# Altium PCB PCBV3_b.PcbDoc
Units mm, origin at the board's own origin, x right, y up, seen from the top; angles counter-clockwise.
Board outline 25 x 50 mm, 2 copper layers (Top Layer, Bottom Layer); 34 components, 34 nets, 132 pads, 7 vias.
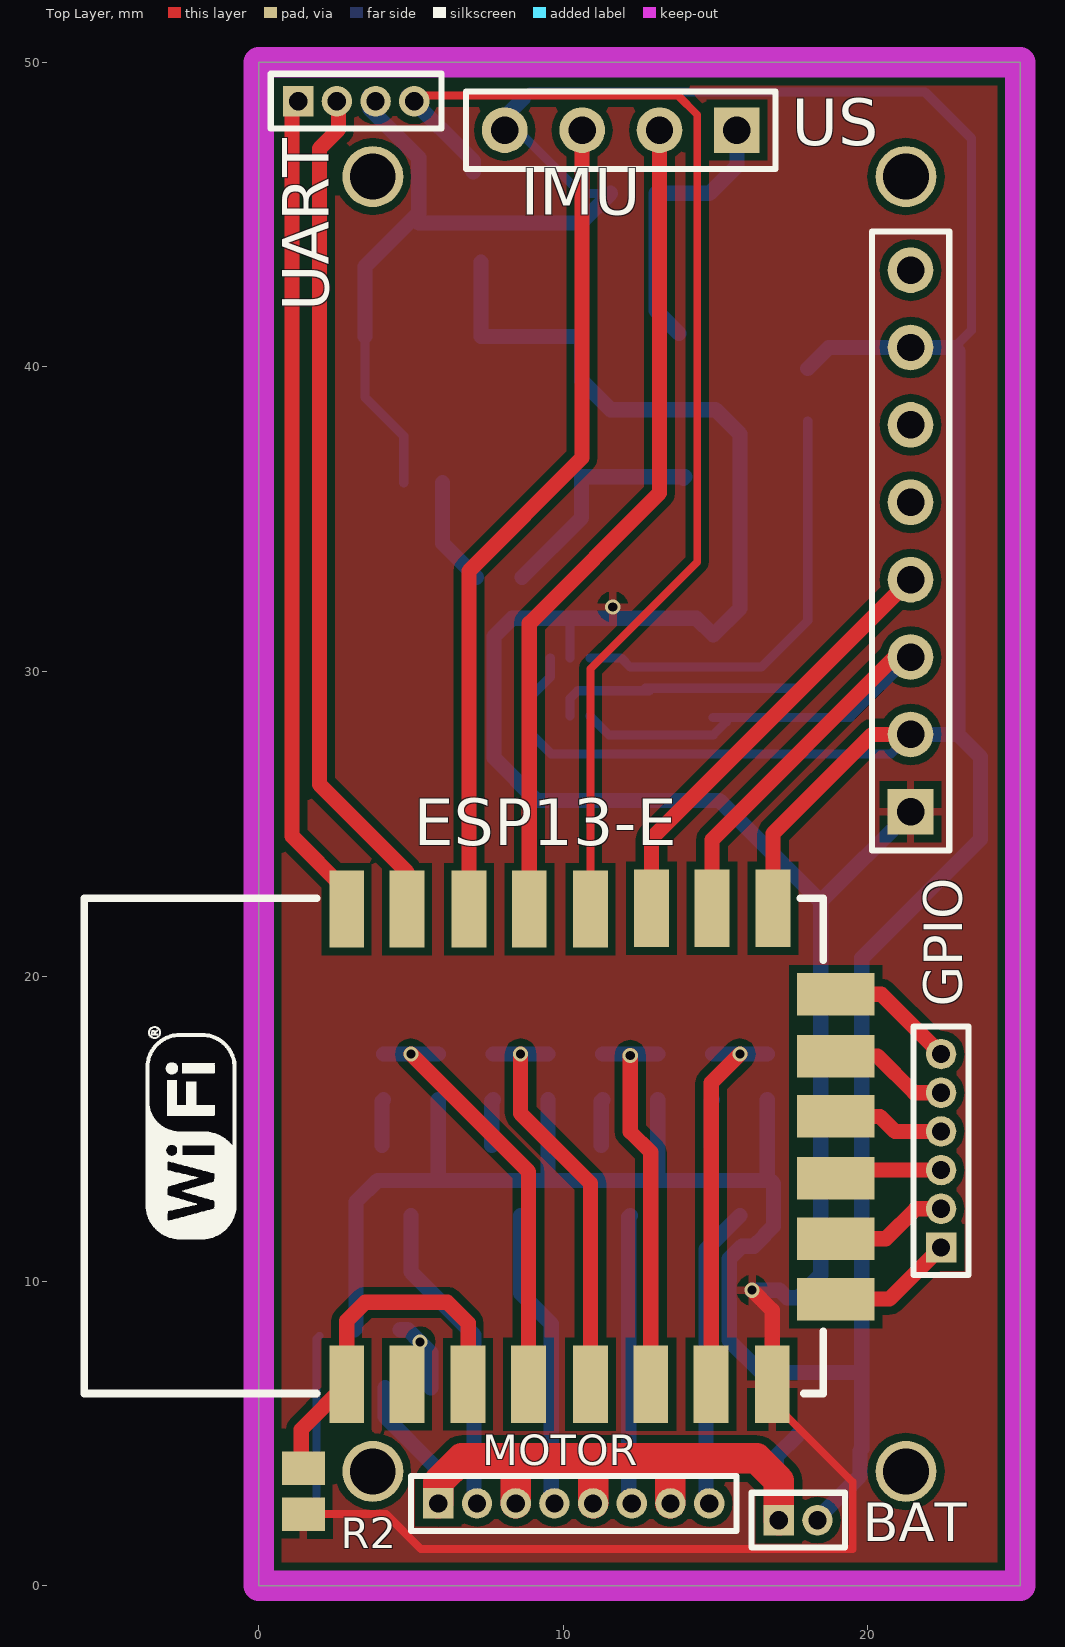
[diagram p0: Top Layer view]
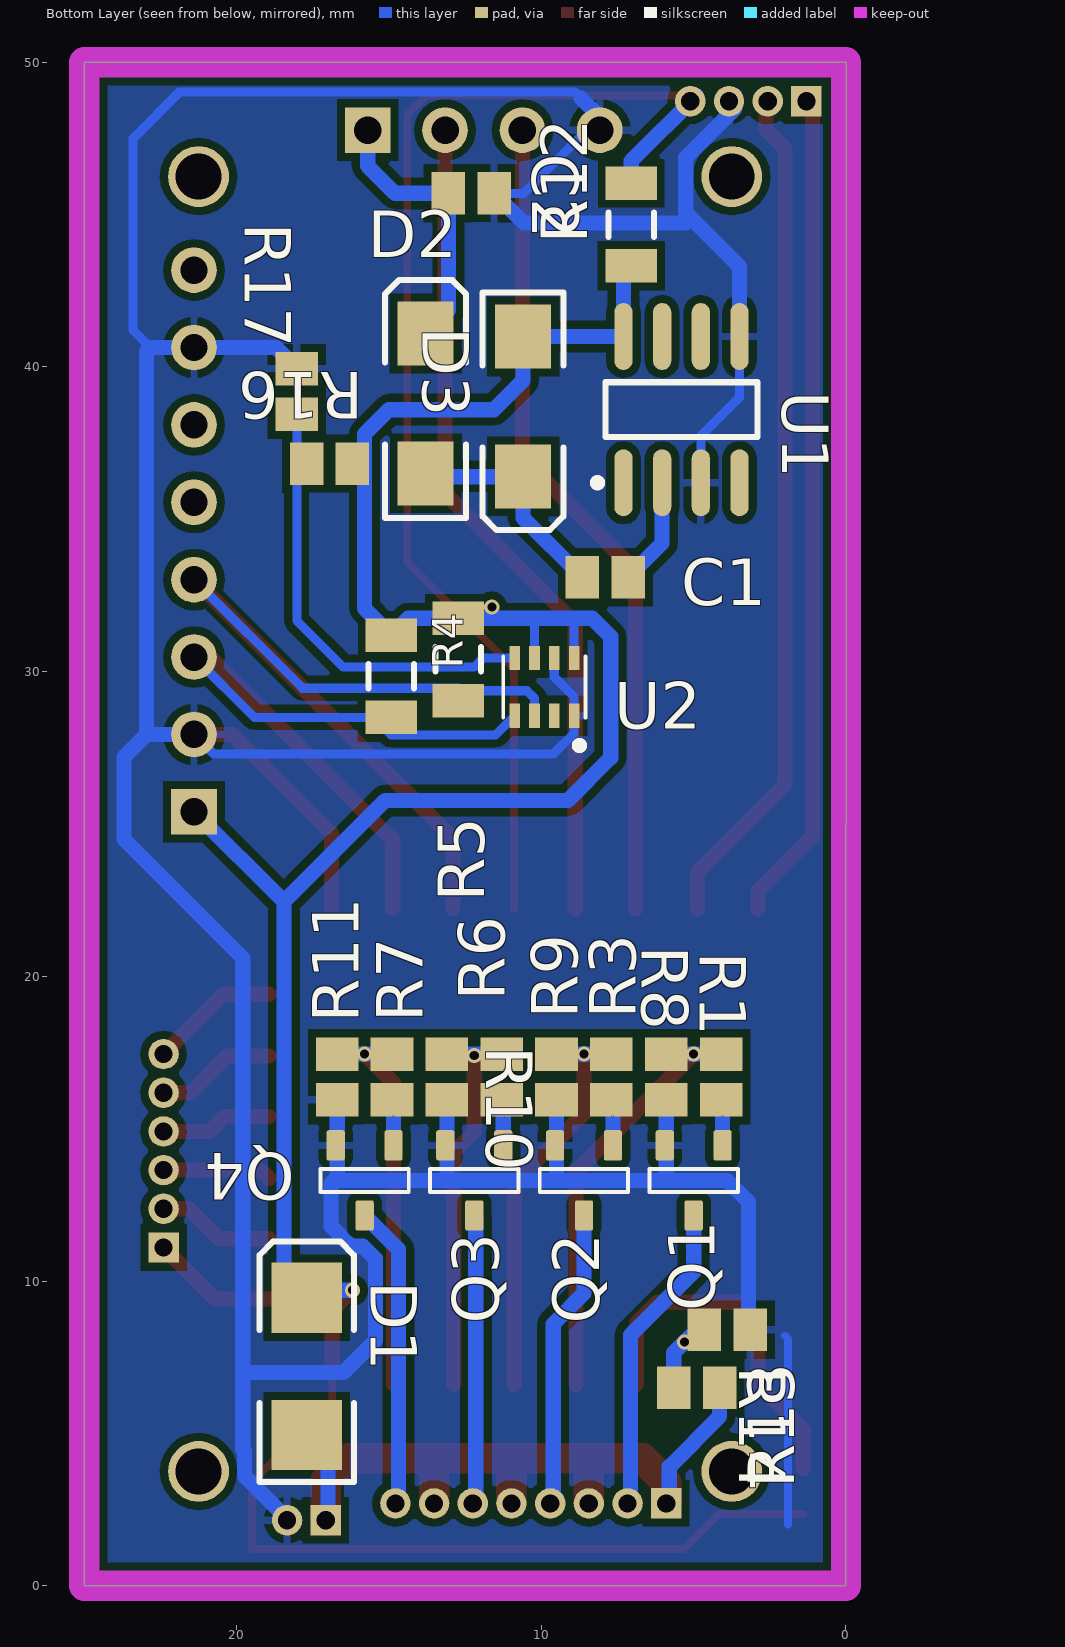
[diagram p1: Bottom Layer view, seen from below]

## Layer stack, top to bottom
Top Solder: solder mask 0.0102, Solder Resist, Dk 3.5
Top Layer: signal copper 0.0356
Dielectric 1: dielectric 0.32, FR-4, Dk 4.8
Bottom Layer: signal copper 0.0356
Bottom Solder: solder mask 0.0102, Solder Resist, Dk 3.5

## Board outline
0,0 25,0 25,50 0,50

## Design rules (kind name [scope] priority, off if disabled: settings)
Clearance [All] p1: gap=0.256
PolygonConnect [All] p1: connectstyle=Relief reliefconductorwidth=0.254 reliefentries=4 polygonreliefangle="90 Angle" airgapwidth=0.254
RoutingVias [All] p1: holewidth=0.711 width=1.27 viastyle="Through Hole" minholewidth=0.711 minwidth=1.27 maxholewidth=0.711 maxwidth=1.27
SolderMaskExpansion [All] p1: expansion=0.102
Width [All] p1: maxlimit=2 minlimit=0.256 preferedwidth=0.5
30 further rules are at their usual default settings.

## Components (designator, comment, footprint, x,y, rotation, side; value= is the part's Value field where it differs from the comment)
BAT "Header 2" MHDR1X2 17.075,2.15 r0 top (schematic designator P1)
C1 "Cap" C0805 7.9,33.1 r0 bottom
C2 "Cap" C0805 12.3,45.7 r0 bottom
D1 "Diode 1N5402" DSO-C2/X2.3 17.7,7.2 r90 bottom
D2 "Diode 1N5402" DSO-C2/Z6.7 13.8,38.8 r90 bottom
D3 "Diode 1N5402" DSO-C2/Z6.7 10.6,38.7 r270 bottom
ESP13-E "ESP8266 ESP-12-E" "ESP8266 ESP-12-E B" 19.3,23.2 r90 top (schematic designator IC1)
GPIO "MHDR1X6" MHDR1X6 22.4,11.1 r90 top (schematic designator P1)
IMU "Header 8" HDR1X8 21.4,25.4 r90 top (schematic designator P5)
MOTOR "MHDR1X8" MHDR1X8 5.9,2.7 r0 top (schematic designator P3)
Q1 "MOSFET-N" SOT23-3 5,13.3 r270 bottom
Q2 "MOSFET-N" SOT23-3 8.6,13.3 r270 bottom
Q3 "MOSFET-N" SOT23-3 12.2,13.3 r270 bottom
Q4 "MOSFET-N" SOT23-3 15.8,13.3 r270 bottom
R1 "Res3" C0805 4.1,16.7 r270 bottom
R2 "Res3" C0805 1.475,3.1 r90 top
R3 "Res3" C0805 7.7,16.7 r270 bottom
R4 "Res3" C1206 14.925,29.85 r90 bottom
R5 "Res3" C1206 12.725,30.4 r90 bottom
R6 "Res3" C0805 11.3,16.7 r270 bottom
R7 "Res3" C0805 14.9,16.7 r270 bottom
R8 "Res3" C0805 5.9,16.7 r270 bottom
R9 "Res3" C0805 9.5,16.7 r270 bottom
R10 "Res3" C0805 13.1,16.7 r270 bottom
R11 "Res3" C0805 16.7,16.7 r270 bottom
R12 "Res3" C1206 7.05,44.675 r90 bottom
R13 "Res3" C0805 4.9,6.5 r0 bottom
R14 "Res3" C0805 3.9,8.4 r180 bottom
R16 "Res3" C0805 16.95,36.825 r180 bottom
R17 "Res3" C0805 18.025,39.2 r90 bottom
U1 "LMC7660IM" M08A_N 5.4,38.6 r90 bottom
U2 "BMP280" LGA-8_BMP280(Primary) 9.9,29.5 r270 bottom
UART "MHDR1X4" MHDR1X4 1.3,48.725 r0 top (schematic designator P2)
US "Header 4" HDR1X4 15.7,47.775 r180 top (schematic designator P4)

## Footprints (in the part's own frame and the unit in brackets; to place one, negate y for a bottom-side part, rotate by r counter-clockwise, add the part's x,y. Pads: shape width x height; smd on the part's side, far side on the other; paste and mask are expansions set on the pad)
C0805 [mm] "Chip Capacitor, Body 2.0x1.3mm, IPC High Density"
  rect 1.1x1.4 smd: 1(-0.75,0) 2(0.75,0)
  body extent -1.1,-0.72 1.1,0.72, height 1.4
C1206 [mm] "Chip Capacitor, Body 3.2x1.6mm, IPC High Density"
  rect 1.1x1.7 smd: 1(-1.35,0) 2(1.35,0)
  silkscreen extent -0.4,-0.75 0.4,0.75, body extent -1.7,-0.9 1.7,0.9, height 1.3
DSO-C2/X2.3 [mm] "DO-214-AA/SMB; 2 C-Bend Leads; Body 5.3 x 3.6 mm, inc. leads (LxW)"
  rect 2.3x2.3 smd: 1(-2.25,0) 2(2.25,0)
  silkscreen extent -3.8,-1.55 4.1,1.55
DSO-C2/Z6.7 [mm] "DO-214-AC/SMA; 2 C-Bend Leads; Body 5.3 x 2.6 mm, inc. leads (LxW)"
  rect 2.1x1.85 smd: 1(-2.3,0) 2(2.3,0)
  silkscreen extent -3.75,-1.33 4.05,1.33
"ESP8266 ESP-12-E B" [mil] "ESP8266 ESP-12-E"
  rect 100x45 smd: 1(-653,646) 2(-653,568) 3(-653,489) 4(-653,411) 5(-653,331) 6(-653,253) 7(-653,175) 8(-653,96) 15(-38,95) 16(-38,174) 17(-38,252) 18(-39,331) 19(-39,410) 20(-39,488) 21(-39,568) 22(-39,646)
  rect 55x100 smd: 9(-543,14) 10(-465,14) 11(-387,14) 12(-307,14) 13(-229,14) 14(-149,14)
  silkscreen extent -665,30 -25,985
HDR1X4 [mm] "Connector; Header; 4 Position"
  rect 1.5x1.5 hole 0.9: 1(0,0)
  round 1.5 hole 0.9: 2(2.54,0) 3(5.08,0) 4(7.62,0)
  silkscreen extent -1.27,-1.27 8.89,1.27
HDR1X8 [mm] "Connector; Header; 8 Position"
  rect 1.5x1.5 hole 0.9: 1(0,0)
  round 1.5 hole 0.9: 2(2.54,0) 3(5.08,0) 4(7.62,0) 5(10.16,0) 6(12.7,0) 7(15.24,0) 8(17.78,0)
  silkscreen extent -1.27,-1.27 19.05,1.27
LGA-8_BMP280(Primary) [mm]
  rect 0.8x0.35 smd paste-25.4 mask-25.4: 1(0.95,0.975) 2(0.95,0.325) 3(0.95,-0.325) 4(0.95,-0.975) 5(-0.95,-0.975) 6(-0.95,-0.325) 7(-0.95,0.325) 8(-0.95,0.975)
  silkscreen extent -1,-1.35 2.02,1.35
M08A_N [mm] "SOIC, 8-Leads, Body 4.9x3.9mm, Pitch 1.27mm, IPC Medium Density"
  oval 2.2x0.6 smd: 1(-2.4,1.905) 2(-2.4,0.635) 3(-2.4,-0.635) 4(-2.4,-1.905) 5(2.4,-1.905) 6(2.4,-0.635) 7(2.4,0.635) 8(2.4,1.905)
  silkscreen extent -2.52,-2.5 0.9,2.88, body extent -2,-2.5 2,2.5, height 1.75
MHDR1X2 [mm] "Connector; Header; 2 Position"
  rect 1x1 hole 0.6: 1(0,0)
  round 1 hole 0.6: 2(1.27,0)
  silkscreen extent -0.9,-0.9 2.17,0.9
MHDR1X4 [mm] "Connector; Header; 4 Position"
  rect 1x1 hole 0.6: 1(0,0)
  round 1 hole 0.6: 2(1.27,0) 3(2.54,0) 4(3.81,0)
  silkscreen extent -0.9,-0.9 4.71,0.9
MHDR1X6 [mm] "Connector; Header; 6 Position"
  rect 1x1 hole 0.6: 1(0,0)
  round 1 hole 0.6: 2(1.27,0) 3(2.54,0) 4(3.81,0) 5(5.08,0) 6(6.35,0)
  silkscreen extent -0.9,-0.9 7.25,0.9
MHDR1X8 [mm] "Connector; Header; 8 Position"
  rect 1x1 hole 0.6: 1(0,0)
  round 1 hole 0.6: 2(1.27,0) 3(2.54,0) 4(3.81,0) 5(5.08,0) 6(6.35,0) 7(7.62,0) 8(8.89,0)
  silkscreen extent -0.9,-0.9 9.79,0.9
SOT23-3 [mm] "SOT23, 3 pin"
  round 0.5 on Mech15: 0(0,0)
  rrect25% 1x0.6 smd: 1(-1.15,0.95) 2(-1.15,-0.95) 3(1.15,0)
  silkscreen extent -0.38,-1.45 0.38,1.45, body extent -1.4,-1.45 1.4,1.45, height 1.29

## Part data
BAT: "Header, 2-Pin"
C1 C2: "Capacitor"
D1 D2 D3: "3 Amp General Purpose Rectifier"
GPIO: "Header, 6-Pin"
IMU MOTOR: "Header, 8-Pin"
Q1 Q2 Q3 Q4: "N-Channel MOSFET"
R1 R2 R3 R4 R5 R6 R7 R8 R9 R10 R11 R12 R13 R14 R16 R17: "Resistor"
U1: "Switched Capacitor Voltage Converter, 8-pin Narrow SOIC"
U2: "Barometro"
UART US: "Header, 4-Pin"

## Free pads (board coordinates)
  round 2 hole 1.5: 1(3.75,46.25) 2(21.25,46.25) 3(21.25,3.75) 4(3.75,3.75)

## Via types
v1: diameter 0.5, hole 0.3, Top Layer to Bottom Layer, 7 vias

## Nets (pads, with @x,y where several pads share a name; then routed paths per layer and width w, separated by ;. In a path a pad name is that pad's centre, name@x,y a point inside that pad or via, vN(x,y) a via of type N, cw(c..) or ccw(c..) an arc to the next point about the centre after c; other vN are vias at no path point)
5VCC: C2.2 D2.2 US.1 | length 9.5
  Bottom Layer w0.5: D2.2 13.05,41.85 C2.2 14.8,45.7 15.7,46.6 US.1@15.7,48.2
ADC: ESP13-E.2 R13.2 R14.1 | length 2.5
  Bottom Layer w0.5: R14.1 4.9,8.4 v1(5.3,8) 5.65,7.65 R13.2
BOOT: ESP13-E.18 R12.2 UART.4 | length 40.9
  Top Layer w0.256: UART.4@4.91,48.9 UART.4@5.285,48.9 ; UART.4 UART.4@5.285,48.9 ; ESP13-E.18 10.893,30.093 14.4,33.6 14.4,48.275 13.766,48.909 5.294,48.909 UART.4@5.285,48.9
  Bottom Layer w0.5: UART.4@4.91,48.9 7.05,46.76 R12.2@7.05,46.4
ECHO: ESP13-E.20 US.3 | length 27.5
  Top Layer w0.5: ESP13-E.20 6.905,33.305 10.62,37.02 US.3@10.62,48.2
GND: BAT.2 C2.1 ESP13-E.15 IMU.2 IMU.7 Q1.2 Q2.2 Q3.2 Q4.2 R8.2 R9.2 R10.2 R11.2 R14.2 R17.2 U1.3 U1.5 U2.1 U2.7 UART.3 US.4 | length 167.9
  Top Layer w0.5: ESP13-E.15 16.887,24.687 20.14,27.94 IMU.2
  Bottom Layer w0.256: 1.9,2 1.9,8.1 2,8.2
  Bottom Layer w0.3: U1.5 3.495,39.005 4.765,37.735 U1.3 ; US.4@8.08,48.2 10.58,45.7 C2.1 ; 8.7,48.82 8.905,49.025 21.875,49.025 23.4,47.5 23.4,41.2 22.84,40.64 ; U2.7 9.575,29.825 8.925,29.175 U2.1 8.925,27.975 9.6,27.3 20.76,27.3 IMU.2
  Bottom Layer w0.5: R14.2 3.2,8.45 3.2,12.6 3.9,13.3 5.9,13.3 ; U1.5 3.495,43.295 5.256,45.056 ; UART.3@3.64,48.9 3.64,48.49 5.256,46.874 5.256,44.725 10.575,44.725 C2.1 ; R8.2 5.9,13.3 ; US.4@7.774,47.894 US.4@8.08,48.2 ; US.4@8.08,47.88 US.4@8.08,48.2 ; 8.7,48.82 US.4@8.08,48.2 ; R9.2 9.5,13.4 9.6,13.3 ; R10.2 13.1,13.4 13.2,13.3 ; 16.7,13.5 R11.2 ; R17.2 18.715,40.64 IMU.7 22.84,40.64 22.96,40.52 22.96,27.94 ; BAT.2@18.27,2.125 19.744,3.599 19.744,4.43 19.8,4.486 19.8,7 ; IMU.2 22.96,27.94 ; 5.9,13.3 9.6,13.3 ; 9.6,13.3 13.2,13.3 ; 13.2,13.3 16.8,13.3 16.9,13.2 16.9,11.8 16.606,11.506 16.606,11.484 16.266,11.144 15.863,11.144 15.446,10.727 15.446,10.015 15.444,10.013 15.444,9.387 15.446,9.385 15.446,8.054 16.5,7 19.8,7 ; 19.8,7 19.8,20.6 23.7,24.5 23.7,27.2 22.96,27.94
GPIO_1: ESP13-E.9 GPIO.1 | length 4.2
  Top Layer w0.5: ESP13-E.9 20.708,9.408 GPIO.1
GPIO_2: ESP13-E.10 GPIO.2 | length 3.9
  Top Layer w0.5: ESP13-E.10 20.589,11.389 21.57,12.37 GPIO.2
GPIO_3: ESP13-E.11 GPIO.3 | length 3.6
  Top Layer w0.5: ESP13-E.11 19.214,13.64 GPIO.3
GPIO_4: ESP13-E.12 GPIO.4 | length 3.7
  Top Layer w0.5: ESP13-E.12 20.398,15.402 20.89,14.91 GPIO.4
GPIO_5: ESP13-E.13 GPIO.5 | length 4
  Top Layer w0.5: ESP13-E.13 20.317,17.383 21.52,16.18 GPIO.5
GPIO_6: ESP13-E.14 GPIO.6 | length 4.3
  Top Layer w0.5: ESP13-E.14 20.435,19.415 GPIO.6
I2C_SCL: ESP13-E.16 IMU.3 R4.1 U2.4 | length 23.7
  Top Layer w0.5: ESP13-E.16 14.88,24.48 20.88,30.48 IMU.3
  Bottom Layer w0.3: U2.4 11.5,27.925 14.925,27.925 R4.1@15.35,28.35 ; R4.1 19.42,28.5 IMU.3 IMU.3@21.23,30.65
I2C_SDA: ESP13-E.17 IMU.4 R5.1 U2.3 | length 27.8
  Top Layer w0.5: ESP13-E.17 12.899,24.519 IMU.4
  Bottom Layer w0.3: U2.3 10.225,29.125 10.475,29.375 R5.1@12.825,29.375 ; R5.1@12.7,29.425 12.7,29.456 17.836,29.456 IMU.4
NetC1_1: C1.1 U1.2 | length 3.6
  Bottom Layer w0.5: U1.2 6.035,34.215 C1.1
NetC1_2: C1.2 D2.1 D3.2 | length 7.5
  Bottom Layer w0.5: C1.2 10.6,35.05 D3.2 13.9,36.4 13.95,36.35 D2.1@14,36.4
NetESP13-E_1: ESP13-E.1 ESP13-E.3 R2.2 | length 12
  Top Layer w0.5: R2.2@1.4,3.85 1.4,5.122 ESP13-E.1 2.892,8.692 3.5,9.3 6.2,9.3 6.879,8.621 ESP13-E.3
NetMOTOR_2: MOTOR.2 Q1.3 | length 10.5
  Bottom Layer w0.5: Q1.3 5,10.3 7.07,8.23 MOTOR.2@7.07,2.5
NetMOTOR_4: MOTOR.4 Q2.3 | length 10.1
  Bottom Layer w0.5: Q2.3 8.6,9.6 9.61,8.59 MOTOR.4@9.61,2.5
NetMOTOR_6: MOTOR.6 Q3.3 | length 9.7
  Bottom Layer w0.5: MOTOR.6@12.15,2.5 12.15,12.1 Q3.3
NetMOTOR_8: MOTOR.8 Q4.3 | length 10.1
  Bottom Layer w0.5: MOTOR.8@14.69,2.5 14.69,9.072 14.688,9.074 14.688,10.326 14.69,10.328 14.69,11.04 Q4.3
NetQ1_2: Q1.1 R1.2 | length 1.5
  Bottom Layer w0.5: Q1.1 4.05,15.9 R1.2
NetQ2_2: Q2.1 R3.2 | length 1.5
  Bottom Layer w0.5: Q2.1 7.65,15.9 R3.2
NetQ3_2: Q3.1 R6.2 | length 1.5
  Bottom Layer w0.5: Q3.1 11.25,15.9 R6.2
NetQ4_2: Q4.1 R7.2 | length 1.5
  Bottom Layer w0.5: Q4.1 14.85,15.9 R7.2
NetR16_1: R16.1 R17.1 U2.5 | length 14.5
  Bottom Layer w0.3: U2.5 11.9,30.45 12.2,30.15 16.5,30.15 18.025,31.675 R17.1@18.025,38.225
PWM0: ESP13-E.4 R1.1 R8.1 | length 14.2
  Top Layer w0.5: v1(5,17.45) 8.861,13.589 ESP13-E.4
  Bottom Layer w0.5: R1.1 v1(5,17.45) R8.1
PWM1: ESP13-E.5 R3.1 R9.1 | length 13.6
  Top Layer w0.5: v1(8.6,17.45) 8.6,15.5 10.893,13.207 ESP13-E.5
  Bottom Layer w0.5: R3.1 v1(8.6,17.45) R9.1
PWM2: ESP13-E.6 R6.1 R10.1 | length 12.9
  Top Layer w0.5: v1(12.2,17.4) 12.2,14.9 12.874,14.226 ESP13-E.6
  Bottom Layer w0.5: R6.1 R10.1
PWM3: ESP13-E.7 R7.1 R11.1 | length 13
  Top Layer w0.5: ESP13-E.7 14.855,16.505 v1(15.8,17.45)
  Bottom Layer w0.5: R7.1 v1(15.8,17.45) R11.1
RX: ESP13-E.21 UART.2 | length 28.1
  Top Layer w0.5: UART.2@2.37,48.725 2.625,48.47 2.625,47.795 2,47.17 2,26.3 4.873,23.427 ESP13-E.21
TRIGER: ESP13-E.19 US.2 | length 27.8
  Top Layer w0.5: ESP13-E.19 8.886,31.586 13.16,35.86 US.2@13.16,48.2
TX: ESP13-E.22 UART.1 | length 27.4
  Top Layer w0.5: UART.1@1.1,48.9 1.1,24.6 2.892,22.808 ESP13-E.22
VCC: D1.2 D3.1 ESP13-E.8 IMU.1 R2.1 R4.2 R5.2 R12.1 R16.2 U1.8 U2.6 U2.8 | length 94.6
  Top Layer w0.256: R2.1@1.4,2.35 R2.1 4.182,2.35 5.332,1.2 19.5,1.2 19.5,3.4 16.862,6.038 ESP13-E.8 ESP13-E.8@16.862,6.9
  Top Layer w0.5: v1(16.2,9.7) 16.862,9.038 ESP13-E.8@16.862,6.9
  Bottom Layer w0.3: U2.8 8.925,31.75 ; 10.2,31.75 10.225,31.725 U2.6
  Bottom Layer w0.5: R12.1@7.305,43.445 U1.8 D3.1 10.6,39.55 11.55,38.6 15,38.6 15.8,37.8 15.8,32.075 R4.2 14.375,31.75 R5.2 10.2,31.75 8.925,31.75 8.325,31.75 7.725,31.15 7.725,27.175 9.125,25.775 15.125,25.775 18.45,22.45 ; v1(16.2,9.7) 17.1,9.7 17.35,9.45 D1.2 18.45,10.2 18.45,22.45 ; IMU.1 18.45,22.45
  other v1: 11.625,32.125
VCC_BAT: BAT.1 D1.1 MOTOR.1 MOTOR.3 MOTOR.5 MOTOR.7 R13.1 | length 26.1
  Top Layer w1: MOTOR.1 5.9,3.4 6.675,4.175 8.35,4.175 ; MOTOR.3 8.44,4.085 8.35,4.175 ; MOTOR.5 10.98,4.045 10.85,4.175 ; MOTOR.7 13.52,4.13 13.475,4.175 ; BAT.1 17.075,3.45 16.35,4.175 13.475,4.175 ; 8.35,4.175 10.85,4.175 ; 10.85,4.175 13.475,4.175
  Bottom Layer w0.5: R13.1 4.15,5.55 5.8,3.9 MOTOR.1@5.8,2.5 ; BAT.1@17,2.15 17,4.25 D1.1
pads on no net: IMU.5 IMU.6 IMU.8 Q1.0 Q2.0 Q3.0 Q4.0 U1.1 U1.4 U1.6 U1.7 U2.2

## Polygon pours and split planes (outlines as drawn)
VCC on Top Layer "Plano_VCC" (solid, pour order 30): 0,50 25,50 25,0 0,0
GND on Bottom Layer "Plano_GND" (solid, pour order 32): 0,50 25,50 25,0 0,0

## Keep-outs
Keep-Out Layer:
  lines w0.256: 0,0 25,0 25,50 0,50 0,0
  lines w1: 0,0 0,50 25,50 25,0 0,0

## Text inside footprints (layer, text, board x,y; h text height)
ESP13-E: Mechanical 13 "CUTOUT POLYGON" at -4.591,6.615 h0.25 r90; Mechanical 13 "ANTENNA AREA" at -5.099,6.615 h0.25 r90